# Altium PCB 球锁蓝牙20618.PcbDoc (part 2 of 2)
Units mil, origin at the board's own origin, x right, y up, seen from the top; angles counter-clockwise.
Board outline 1946 x 1905.51 mil, 2 copper layers (Top Layer, Bottom Layer); 90 components, 56 nets, 267 pads, 202 vias.
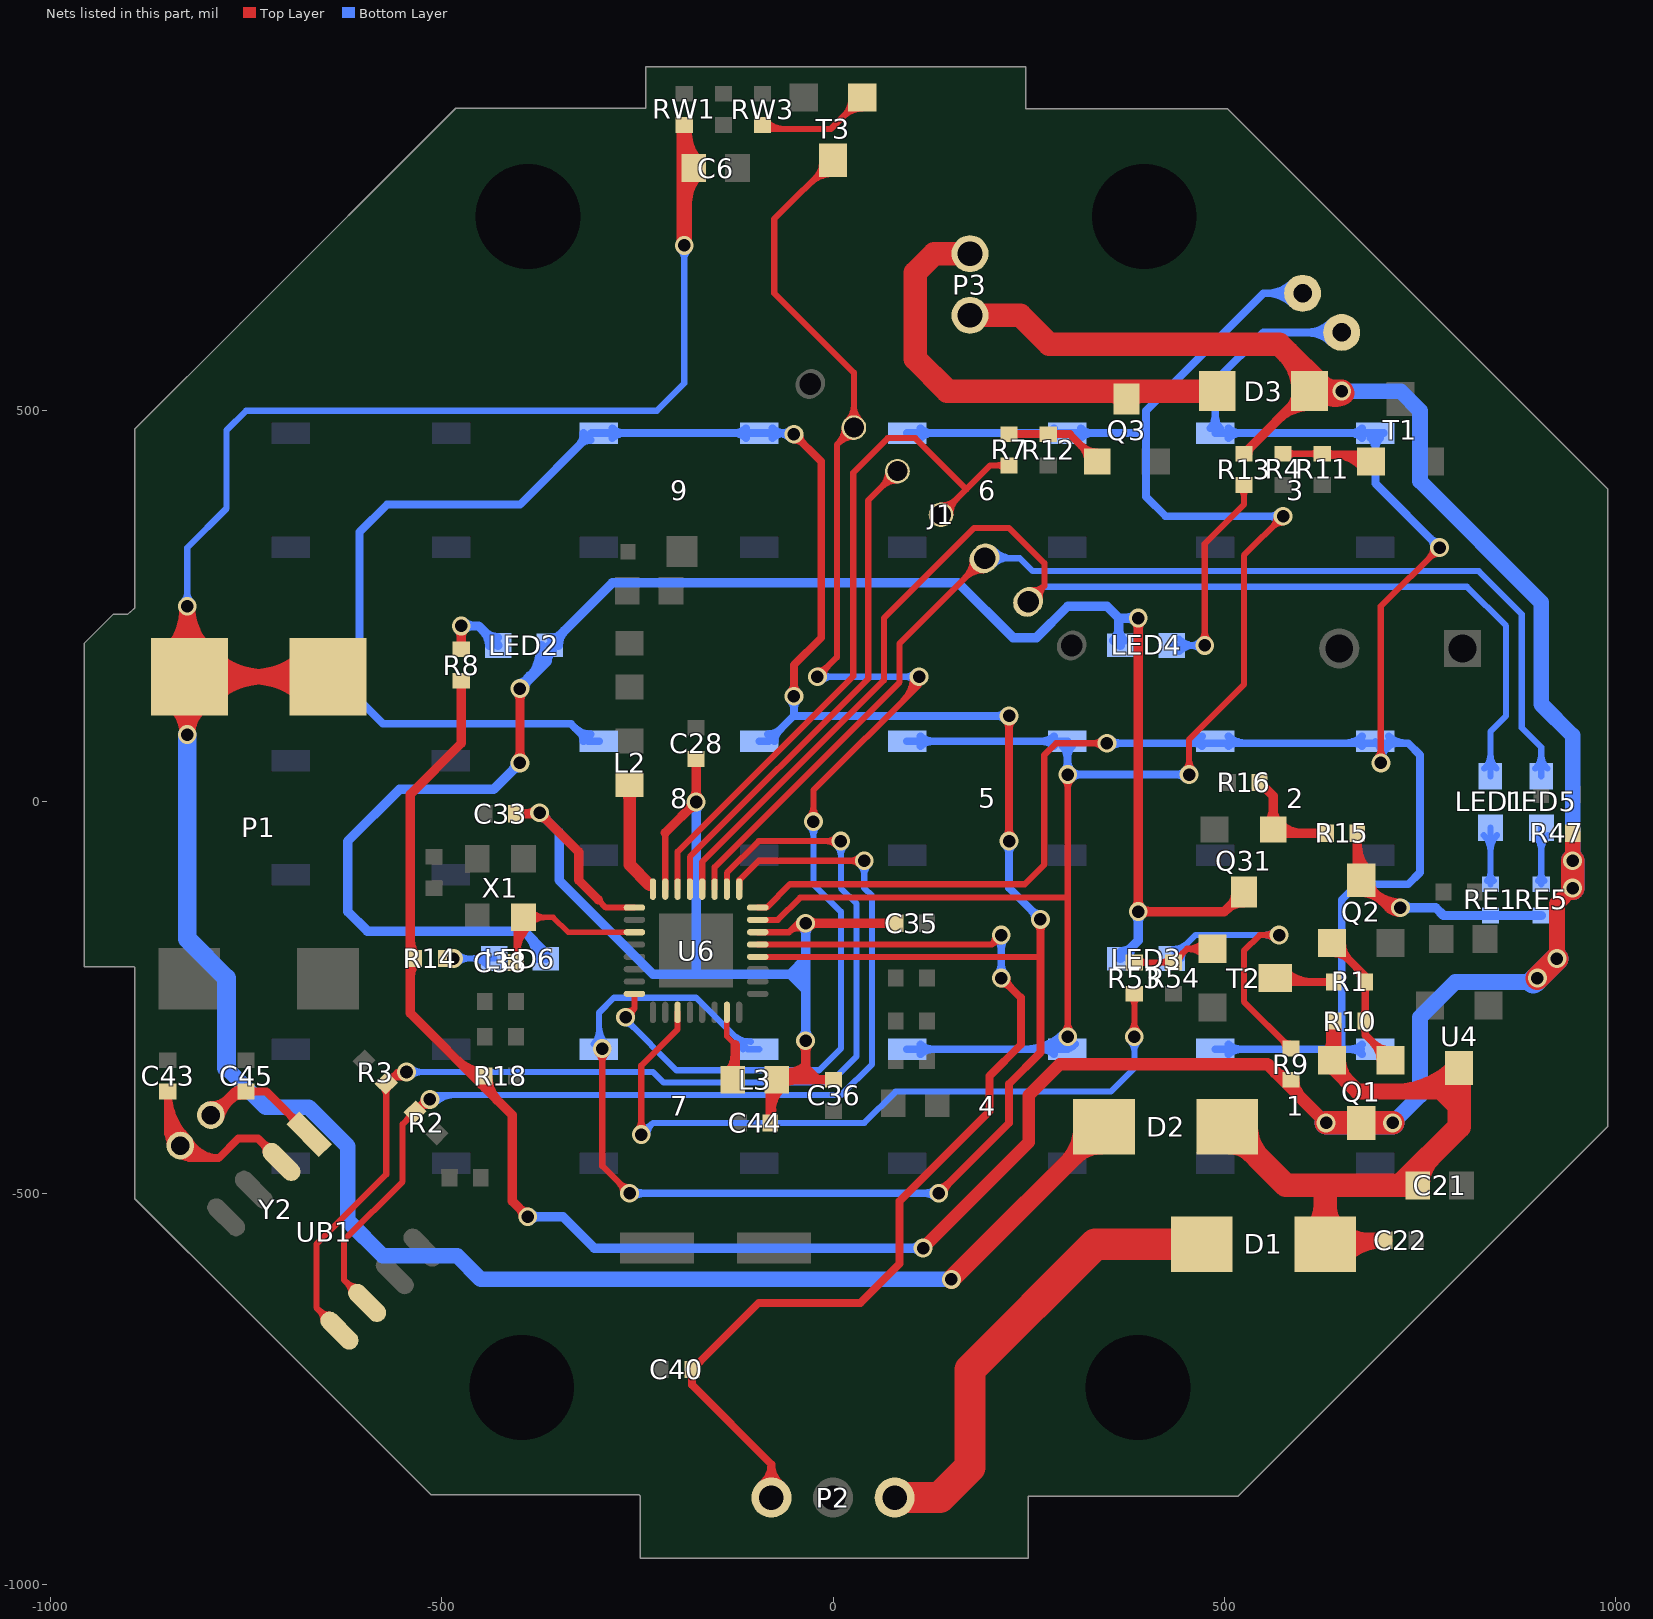
[diagram p2: the nets of this part, all layers, seen from the top]

## Via types
v1: diameter 24, hole 16, Top Layer to Bottom Layer, tented both sides, 202 vias

## Nets (pads, with @x,y where several pads share a name; then routed paths per layer and width w, separated by ;. In a path a pad name is that pad's centre, name@x,y a point inside that pad or via, vN(x,y) a via of type N, cw(c..) or ccw(c..) an arc to the next point about the centre after c; other vN are vias at no path point) (continued)
NetC38_2: C38.2 U6.3 X1.3 | length 479.8
  Top Layer w7: C38.2@-409.6,-199.4 ccw(c-420.69,-188.31) -405,-188.31 ccw(c-389.31,-188.31) C38.2@-400.4,-199.4 ; C38.2@-408.4,-198.46 ccw(c-415.74,-186.48) -402.08,-189.76 ; C38.2@-407,-205 C38.2@-405,-203 ; C38.2@-405,-205 C38.2@-405,-203 ; C38.2@-405,-201.94 cw(c-342.9,-201.94) X1.3@-386.81,-158.03 ; -405,-185.04 cw(c-359.8,-185.04) X1.3@-391.76,-153.08 ; -405,-168.14 cw(c-376.7,-168.14) X1.3@-396.71,-148.13 ; -401.54,-187.5 ccw(c-384.68,-191.54) C38.2@-399.46,-200.6 ; X1.3@-386.81,-156.06 cw(c-365.9,-176.97) -365.9,-147.4 cw(c-365.9,-117.83) X1.3@-386.81,-138.74 ; -275,-166.38 -338.62,-166.38 ; U6.3@-253.74,-166.38 -338.62,-166.38 ; C38.2@-405,-203 -405,-156.93 X1.3@-395.47,-147.4 -357.6,-147.4 -338.62,-166.38
NetC43_1: C43.1 UB1.2 Y2.2 | length 587.1
  Top Layer w10: C43.1@-853.54,-373.54 cw(c-862.07,-382.07) -850,-382.07 cw(c-837.93,-382.07) C43.1@-846.46,-373.54 ; -850,-418 ccw(c-813.18,-418) Y2.2@-839.1,-444.15 ; -850,-394 ccw(c-789.38,-394) Y2.2@-832.06,-437.05 ; Y2.2@-846.34,-435.99 ccw(c-859.78,-432.73) -850,-422.95 ; Y2.2@-840.33,-442.53 ccw(c-819.08,-430.66) -819.08,-455 ; Y2.2@-836.97,-426.62 cw(c-840.22,-413.17) -850,-422.95 ; Y2.2@-831.6,-437.65 ccw(c-802.04,-421.14) -802.04,-455 ; Y2.2@-830.99,-451.34 cw(c-827.73,-464.78) -817.95,-455 ; Y2.2@-825.02,-429.95 cw(c-765.59,-370) C43.1@-850,-370 -850,-422.95 ; Y2.2@-822.87,-432.77 ccw(c-785,-411.62) -785,-455 ; Y2.2@-821.62,-441.97 ccw(c-808.17,-445.22) -817.95,-455 ; UB1.2@-724.04,-447.41 ccw(c-740.48,-447.41) -728.86,-435.79 ccw(c-717.23,-424.16) UB1.2@-717.23,-440.6 ; UB1.2@-704.7,-459.94 -734.64,-430 -760,-430 -785,-455 ; -850,-422.95 Y2.2@-833.98,-438.98 -817.95,-455 ; -817.95,-455 -785,-455
NetC45_2: C45.2 UB1.1 Y2.1 | length 374
  Top Layer w10: Y2.1@-795,-400 -765,-370 C45.2@-750,-370 -723.93,-370 UB1.1@-669.35,-424.59 ; Y2.1@-795,-387.28 ccw(c-795,-356.58) -773.29,-378.29 ccw(c-751.58,-400) Y2.1@-782.28,-400 ; Y2.1@-791.71,-387.72 ccw(c-787.5,-372.02) -779.38,-386.09 ; Y2.1@-783.44,-388.44 cw(c-751,-420.87) C45.2@-751,-375 ; Y2.1@-782.72,-403.29 cw(c-739.1,-414.98) -761.68,-375.87 ; -766.36,-371.36 cw(c-751,-386.73) C45.2@-751,-365 ; C45.2@-754.54,-373.54 ccw(c-763.07,-382.07) -763.07,-370 ccw(c-763.07,-357.93) C45.2@-754.54,-366.46 ; C45.2@-745.46,-373.54 cw(c-736.93,-382.07) -736.93,-370 cw(c-736.93,-357.93) C45.2@-745.46,-366.46 ; UB1.1@-688.69,-412.06 ccw(c-705.13,-412.06) -693.5,-400.43 ccw(c-681.88,-388.8) UB1.1@-681.88,-405.25
NetD1_1: D1.1 P2.1 | length 677.3
  Top Layer w30: D1.1@452.87,-579.45 ccw(c417.99,-614.33) 417.99,-565 ccw(c417.99,-515.67) D1.1@452.87,-550.55
  Top Layer w40: P2.1@78.74,-888.78 136.22,-888.78 175,-850 175,-725 335,-565 D1.1@471.26,-565
NetD3_1: D3.1 P3.1 Q3.C | length 637.5
  Top Layer w30: P3.1@175,700.59 129.37,700.59 105,676.22 105,566.22 146.22,525 D3.1@490.94,525 ; 353.8,525 cw(c353.8,496.76) Q3.C@373.78,516.73 ; Q3.C@376.22,516.73 cw(c396.2,496.76) 396.2,525
NetL2_2: L2.2 U6.32 | length 167.9
  Top Layer w16: L2.2@-265.48,16.52 cw(c-278.71,3.29) -260,3.29 cw(c-241.29,3.29) L2.2@-254.52,16.52 ; L2.2@-260,22 -260,-80 -234.18,-105.82
NetL3_2: L3.2 U6.15 | length 128.9
  Top Layer w7: U6.15@-135.63,-268.74 -135.63,-299.37 -125,-310
  Top Layer w12: L3.2@-134.89,-346.14 ccw(c-158.78,-322.26) -125,-322.26 ; L3.2@-128,-355 -125,-352 -125,-310 ; -125,-336.74 ccw(c-111.71,-336.74) L3.2@-121.11,-346.14
NetLED1_1: LED1.1 RE1.2 | length 140.3
  Bottom Layer w8: LED1.1@831.51,-42.49 cw(c811.03,-62.97) 840,-62.97 cw(c868.97,-62.97) LED1.1@848.49,-42.49 ; RE1.2@835.76,-100.76 ccw(c825.51,-90.51) 840,-90.51 ccw(c854.49,-90.51) RE1.2@844.24,-100.76 ; RE1.2@840,-105 LED1.1@840,-33
NetLED2_1: LED2.1 R8.2 | length 170.4
  Top Layer w11.81: v1@-479.18,220.82 cw(c-489.26,210.74) -475,210.74 cw(c-460.74,210.74) v1@-470.82,220.82 ; R8.2@-475,195 v1(-475,225)
  Bottom Layer w11.81: v1(-475,225) -453,225 LED2.1@-428,200 ; v1@-470.82,220.82 cw(c-460.74,210.74) -460.74,225 cw(c-460.74,239.26) v1@-470.82,229.18 ; -446.94,218.94 cw(c-465.88,200) LED2.1@-439.09,200 ; -444.53,216.53 ccw(c-429,232.05) LED2.1@-429,210.09
NetLED2_2: LED2.2 LED3.2 LED4.2 LED6.2 Q31.C | length 2786.3
  Top Layer w12: v1@-404.11,54.11 ccw(c-414.03,64.03) -400,64.03 ccw(c-385.97,64.03) v1@-395.89,54.11 ; v1@-404.11,140.89 cw(c-414.03,130.97) -400,130.97 cw(c-385.97,130.97) v1@-395.89,140.89 ; v1(-400,50) v1(-400,145) ; v1@385.89,-135.89 ccw(c375.97,-125.97) 390,-125.97 ccw(c404.03,-125.97) 394.11,-135.89 ccw(c404.03,-125.97) 404.03,-140 ccw(c404.03,-154.03) v1@394.11,-144.11 ; v1@385.89,230.89 cw(c375.97,220.97) 390,220.97 cw(c404.03,220.97) v1@394.11,230.89 ; v1(390,235) v1(390,-140) 500,-140 Q31.C@525,-115 ; 501.64,-138.36 cw(c525,-161.72) Q31.C@525,-128.68 ; Q31.C@508.77,-131.23 ccw(c495.49,-117.95) Q31.C@514.27,-117.95
  Bottom Layer w12: v1@-405.81,50 cw(c-419.84,50) -409.92,40.08 cw(c-400,30.16) v1@-400,44.19 ; v1@-401.5,150.61 ccw(c-407.46,172.86) -387.52,161.34 ; v1(-400,50) -433.87,16.13 -553.87,16.13 -620,-50 -620,-140 -595,-165 -395,-165 -367,-193 LED6.2@-367,-200 ; v1(-400,145) -365,180 ; v1@-400,150.81 ccw(c-400,164.84) -390.08,154.92 ccw(c-380.16,145) v1@-394.19,145 ; v1@-392.8,152.2 ccw(c-440.6,200) LED2.2@-373,200 ; -390.73,-169.27 cw(c-421.46,-200) LED6.2@-378,-200 ; -372.31,172.69 ccw(c-399.63,200) LED2.2@-361,200 ; LED2.2@-370.36,193.64 cw(c-383.31,180.69) -365,180.69 ; LED2.2@-360,209 ccw(c-360,225.9) LED2.2@-348.05,213.95 ; LED2.2@-358.59,192.81 ccw(c-348.95,179.98) -365,179.98 ; LED2.2@-351,200 cw(c-324.44,200) -343.22,218.78 ; LED4.2@358.64,206.36 ccw(c343.27,221.73) 365,221.73 ccw(c386.73,221.73) LED4.2@371.36,206.36 ; LED3.2@367,-193 LED3.2@367,-200 390,-177 v1(390,-140) ; LED4.2@367,200 365,202 365,235 ; LED3.2@369,-191 ccw(c369,-174.1) LED3.2@380.95,-186.05 ; LED3.2@378,-200 cw(c404.56,-200) 385.78,-181.22 ; v1@385.89,-144.11 cw(c375.97,-154.03) 390,-154.03 cw(c404.03,-154.03) v1@394.11,-144.11 ; v1@385.89,230.89 ccw(c375.97,220.97) 375.97,235 ccw(c375.97,249.03) v1@385.89,239.11 ; v1(390,235) 365,235 ; -365,180 LED2.2@-365,190 ; LED2.2@-365,190 -362,193 LED2.2@-362,200 ; LED2.2@-365,190 -365,197 LED2.2@-362,200 ; LED2.2@-362,200 -282,280 160,280 230,210 260,210 300,250 350,250 365,235
NetLED3_1: LED3.1 R9.2 | length 480.1
  Top Layer w8: v1@564.48,-175.52 ccw(c551.14,-188.86) 551.14,-170 ccw(c551.14,-151.14) v1@564.48,-164.48 ; v1(570,-170) 545,-170 525,-190 525,-255 R9.2@585,-315 ; 573.05,-303.05 cw(c561.1,-315) R9.2@578,-315 ; R9.2@575.46,-305.46 ccw(c584,-296.93) R9.2@584,-309
  Bottom Layer w8: LED3.1@433,-200 463,-170 v1(570,-170) ; LED3.1@434,-188 ccw(c434,-161.44) 452.78,-180.22 ; LED3.1@446,-200 cw(c477.38,-200) 455.19,-177.81 ; v1@564.48,-175.52 ccw(c551.14,-188.86) 551.14,-170 ccw(c551.14,-151.14) v1@564.48,-164.48
NetLED4_1: LED4.1 R13.2 | length 395.2
  Top Layer w8: v1@469.48,205.52 ccw(c456.14,218.86) 475,218.86 ccw(c493.86,218.86) v1@480.52,205.52 ; v1(475,200) 475,330 525,380 R13.2@525,405 ; R13.2@520.76,400.76 cw(c510.51,390.51) 525,390.51 cw(c539.49,390.51) R13.2@529.24,400.76
  Bottom Layer w8: LED4.1@433,200 v1(475,200) ; LED4.1@442.49,191.51 cw(c462.97,171.03) 462.97,200 cw(c462.97,228.97) LED4.1@442.49,208.49 ; v1@469.48,194.48 ccw(c456.14,181.14) 456.14,200 ccw(c456.14,218.86) v1@469.48,205.52
NetLED5_1: LED5.1 RE5.2 | length 140.7
  Bottom Layer w7.87: LED5.1@896.47,-42.53 cw(c875.88,-63.12) 905,-63.12 cw(c934.12,-63.12) LED5.1@913.53,-42.53 ; RE5.2@900.71,-100.71 ccw(c890.36,-90.36) 905,-90.36 ccw(c919.64,-90.36) RE5.2@909.29,-100.71 ; RE5.2@905,-105 LED5.1@905,-33
NetLED6_1: LED6.1 R14.2 | length 137.1
  Top Layer w12: R14.2@-495,-200 v1(-485,-200)
  Bottom Layer w8: v1(-485,-200) LED6.1@-433,-200 ; v1@-479.48,-205.52 cw(c-466.14,-218.86) -466.14,-200 cw(c-466.14,-181.14) v1@-479.48,-194.48 ; LED6.1@-442.49,-208.49 ccw(c-462.97,-228.97) -462.97,-200 ccw(c-462.97,-171.03) LED6.1@-442.49,-191.51
NetQ1_G: Q1.G Q2.G R1.1 R10.2 | length 371.1
  Top Layer w10: Q2.G@637.6,-193 cw(c637.6,-224.38) 659.79,-202.19 cw(c681.98,-180) Q2.G@650.6,-180 ; Q2.G@637.6,-180 680,-222.4 R1.1@680,-230 R10.2@680,-280 680,-297.6 Q1.G@712.4,-330 Q1.G@712.4,-317.4 ; 666.8,-209.2 cw(c647,-229) R1.1@675,-229 ; R10.2@676.46,-284.54 cw(c667.93,-293.07) 680,-293.07 cw(c692.07,-293.07) R10.2@683.54,-284.54 ; R10.2@676.46,-275.46 ccw(c667.93,-266.93) 680,-266.93 ccw(c692.07,-266.93) R10.2@683.54,-275.46 ; R1.1@676.46,-234.54 cw(c667.93,-243.07) 680,-243.07 cw(c692.07,-243.07) R1.1@683.54,-234.54 ; Q1.G@699.4,-330 ccw(c668.02,-330) 690.21,-307.81 ccw(c712.4,-285.62) Q1.G@712.4,-317
NetQ3_B: Q3.B R7.1 R12.1 | length 272.4
  Top Layer w10: R7.1@225,470 R12.1@275,470 ; R7.1@229.54,466.46 cw(c238.07,457.93) 238.07,470 cw(c238.07,482.07) R7.1@229.54,473.54 ; R12.1@270.46,466.46 ccw(c261.93,457.93) 261.93,470 ccw(c261.93,482.07) R12.1@270.46,473.54 ; 300,470 R12.1@275,470 ; Q3.B@325.87,435 ccw(c297.54,435) 317.57,455.03 ccw(c337.6,475.06) Q3.B@337.6,446.73 ; Q3.B@337.6,435 302.6,470 R12.1@275,470 ; 288.07,470 cw(c288.07,482.07) 279.54,473.54 ccw(c288.07,482.07) 288.07,470 ; 288.07,470 ccw(c288.07,457.93) 279.54,466.46 cw(c288.07,457.93) 288.07,470
NetQ31_B: Q31.B R15.1 R16.2 | length 221.5
  Top Layer w11.81: R16.2@545,19.91 cw(c545,7.61) R16.2@553.7,16.3 ; R16.2@545,25 562.4,7.6 Q31.B@562.4,-35 567.4,-40 R15.1@630,-40 ; Q31.B@554.75,-27.34 ccw(c536.26,-8.86) 562.4,-8.86 ccw(c588.54,-8.86) 570.06,-27.34 ccw(c600.61,3.21) 600.61,-40
NetR1_2: R1.2 T2.3 | length 174.4
  Top Layer w10: T2.3@570.77,-222.88 ccw(c587.97,-205.69) 587.97,-230 ccw(c587.97,-244.31) T2.3@577.85,-234.19 ; T2.3@575,-225 T2.3@565,-225 570,-230 R1.2@640,-230 ; T2.3@577.85,-215.81 ccw(c612.11,-181.54) 612.11,-230 ; R1.2@636.46,-233.54 ccw(c627.93,-242.07) 627.93,-230 ccw(c627.93,-217.93) R1.2@636.46,-226.46
NetR4_1: R4.1 R11.1 T1.1 | length 324.4
  Top Layer w7.87: R4.1@575,445 R11.1@625,445 677.6,445 T1.1@687.6,435 ; R4.1@580.29,440.71 cw(c590.64,430.36) 590.64,445 cw(c590.64,459.64) R4.1@580.29,449.29 ; R11.1@619.71,440.71 ccw(c609.36,430.36) 609.36,445 ccw(c609.36,459.64) R11.1@619.71,449.29 ; R11.1@629.23,439.87 cw(c638.45,425.25) 642.27,442.1 ; R11.1@629.5,445 cw(c629.5,376.91) T1.1@677.65,425.06 ; R11.1@630.29,440.71 cw(c640.64,430.36) 640.64,445 cw(c640.64,459.64) R11.1@630.29,449.29 ; R11.1@631.13,448.23 ccw(c641.27,454.63) 638.62,442.93 ; 648.51,445 cw(c648.51,395.92) T1.1@683.22,430.62 ; 667.52,445 cw(c667.52,414.93) T1.1@688.79,436.19
NetR53_2: R53.2 R54.2 T2.1 | length 225.7
  Top Layer w8: R53.2@385,-205 R54.2@435,-205 452.4,-187.6 ; R53.2@390.24,-209.24 cw(c400.49,-219.49) 400.49,-205 cw(c400.49,-190.51) R53.2@390.24,-200.76 ; R54.2@429.76,-209.24 ccw(c419.51,-219.49) 419.51,-205 ccw(c419.51,-190.51) R54.2@429.76,-200.76 ; R54.2@436,-199 ccw(c436,-186.93) R54.2@444.54,-195.46 ; R54.2@442,-205 cw(c458.9,-205) 446.95,-193.05 ; T2.1@474.85,-197.24 ccw(c452.4,-218.54) 452.4,-187.6 ; T2.1@474.85,-177.96 cw(c452.4,-156.65) 452.4,-187.6 ; T2.1@485,-187.6 452.4,-187.6
NetRW3_1: RW3.1 T3.1 | length 224.7
  Top Layer w8: RW3.1@-90,867 -83,860 -2.6,860 T3.1@37.4,900 ; RW3.1@-84.76,869.24 ccw(c-62.44,891.56) -62.44,860 ; T3.1@23.4,900 cw(c-10.4,900) 13.5,876.1 cw(c37.4,852.2) T3.1@37.4,886
P04/LED_RED: J1.3 LED5.2 U6.27 | length 1644.8
  Top Layer w7.87: U6.27@-151.38,-111.26 -151.38,-83.19 85,153.19 85,202.71 J1.3@193.64,311.36 ; J1.3@178.47,309.96 cw(c145.21,309.96) 168.73,286.44 cw(c192.25,262.92) J1.3@192.25,296.18
  Bottom Layer w8: J1.3@193.64,311.36 238.64,311.36 255,295 825,295 880,240 880,95 905,70 LED5.2@905,33 ; J1.3@204.74,303.05 cw(c224.79,282.99) 224.79,311.36 ; J1.3@204.74,322.45 ccw(c231.51,349.22) 231.51,311.36 ; LED5.2@897.22,42.78 ccw(c878.44,61.56) 905,61.56 ccw(c931.56,61.56) LED5.2@912.78,42.78
P05/LED_GREEN: J1.2 LED1.2 U6.28 | length 1690.6
  Top Layer w7.87: U6.28@-167.13,-111.26 -167.13,-76.67 65,155.46 65,235 180,350 225,350 270,305 270,276.36 ; J1.2@249.32,255.68 270,276.36 ; J1.2@252.78,270.69 ccw(c255.79,290.57) 270,276.35 ; J1.2@264.34,259.13 cw(c284.21,262.14) 270,276.35
  Bottom Layer w8: J1.2@249.32,255.68 268.64,275 810,275 860,225 860,110 840,90 LED1.2@840,33 ; LED1.2@832.22,42.78 ccw(c813.44,61.56) 840,61.56 ccw(c866.56,61.56) LED1.2@847.78,42.78
P06/MOTO1: J1.5 U6.29 | length 688.6
  Top Layer w7.87: U6.29@-182.87,-111.26 -182.87,-70.14 45,157.73 45,385.42 J1.5@82.29,422.71 ; J1.5@70.48,422.71 cw(c41.96,422.71) 62.13,402.55 cw(c82.29,382.39) J1.5@82.29,410.9
P07/MOTO0: J1.4 R7.2 U6.30 | length 996
  Top Layer w7.87: U6.30@-198.62,-111.26 -198.62,-63.62 25.75,160.75 25.75,420.75 70,465 105,465 170.47,399.53 ; J1.4@137.97,367.03 170.47,399.53 ; J1.4@137.97,378.84 ccw(c137.97,407.36) 158.13,387.2 ccw(c178.29,367.03) J1.4@149.78,367.03 ; R7.2@219.71,425.71 ccw(c209.36,415.36) 209.36,430 ccw(c209.36,444.64) R7.2@219.71,434.29 ; R7.2@225,430 200.93,430 170.47,399.53
PWR_CTL: R53.1 U6.11 | length 1078.1
  Top Layer w7.87: v1@-250.57,-419.43 ccw(c-264.01,-405.99) -245,-405.99 ccw(c-225.99,-405.99) v1@-239.43,-419.43 ; v1(-245,-425) -245,-336.77 -198.62,-290.39 U6.11@-198.62,-268.74 ; v1@379.43,-294.43 ccw(c365.99,-280.99) 385,-280.99 ccw(c404.01,-280.99) v1@390.57,-294.43 ; R53.1@380.71,-249.29 cw(c370.36,-259.64) 385,-259.64 cw(c399.64,-259.64) R53.1@389.29,-249.29 ; v1(385,-300) R53.1@385,-245
  Bottom Layer w7.87: v1(-245,-425) -230,-410 40,-410 80,-370 355,-370 385,-340 v1(385,-300) ; v1@-245,-417.13 ccw(c-245,-398.12) -231.56,-411.56 ccw(c-218.12,-425) v1@-237.13,-425 ; v1@379.43,-305.57 cw(c365.99,-319.01) 385,-319.01 cw(c404.01,-319.01) v1@390.57,-305.57
RD1_KEYX_2: 4.2 5.2 6.2 pad.1@600,650 U6.23 | length 3323.7
  Top Layer w7.87: U6.23@-96.26,-150.63 -70.63,-150.63 -42.19,-122.19 297.19,-122.19 300,-125 ; v1@294.43,-294.43 ccw(c280.99,-280.99) 300,-280.99 ccw(c319.01,-280.99) v1@305.57,-294.43 ; v1@294.43,29.43 cw(c280.99,15.99) 300,15.99 cw(c319.01,15.99) v1@305.57,29.43 ; v1(300,-300) 300,-125 ; v1(300,35) 300,-125 ; v1@449.43,40.57 ccw(c435.99,54.01) 455,54.01 ccw(c474.01,54.01) v1@460.57,40.57 ; v1(455,35) 455,80 525,150 525,315 v1(575,365) ; v1@567.13,365 cw(c548.12,365) 561.56,351.56 cw(c575,338.12) v1@575,357.13
  Bottom Layer w7.87: 4.2@294.81,-305.92 cw(c285.98,-316.01) 4.2@299.39,-316 ; 4.2@295.26,-307.07 ccw(c292.27,-300.61) v1@299.39,-300.61 ; v1(300,-300) v1@299.39,-300.61 ; 4.2@303.52,-307.07 cw(c306.51,-300.61) v1@299.39,-300.61 ; 4.2@304.42,-306.51 ccw(c310.87,-316.01) 4.2@299.39,-316 ; 4.2@299.39,-316 v1@299.39,-300.61
  Bottom Layer w10: 4.2@94.67,-316 4.2@299.39,-316 ; 5.2@94.67,77.7 5.2@299.39,77.7 299.39,35.61 v1(300,35) v1(455,35) ; 6.2@94.67,471.4 6.2@303.6,471.4 ; 4.2@111.7,-322.21 cw(c126.69,-337.2) 126.69,-316 cw(c126.69,-294.81) 4.2@111.7,-309.8 ; 5.2@111.7,71.49 cw(c126.69,56.5) 126.69,77.7 cw(c126.69,98.89) 5.2@111.7,83.9 ; 6.2@111.7,465.19 cw(c126.69,450.2) 126.69,471.4 cw(c126.69,492.59) 6.2@111.7,477.61 ; 244.92,-316 ccw(c244.92,-244.92) v1@295.18,-295.18 ; 269.06,-316 ccw(c269.06,-269.06) 4.2@302.25,-302.25 ; 4.2@282.35,-322.21 ccw(c267.37,-337.2) 267.37,-316 ccw(c267.37,-294.81) 4.2@282.35,-309.8 ; 5.2@282.35,71.49 ccw(c267.37,56.5) 267.37,77.7 ccw(c267.37,98.89) 5.2@282.35,83.91 ; 6.2@282.35,465.19 ccw(c267.37,450.2) 267.37,471.4 ccw(c267.37,492.59) 6.2@282.35,477.61 ; 4.2@293.2,-316 ccw(c293.2,-293.2) 4.2@309.33,-309.33 ; 5.2@293.18,71.49 cw(c278.19,56.5) 299.39,56.5 cw(c320.59,56.5) 5.2@305.6,71.49 ; v1@295.18,39.82 ccw(c285.03,49.97) 299.39,49.97 ; 299.39,52.92 ccw(c317.92,52.92) 304.82,39.82 ccw(c316.44,51.44) 316.44,35 ccw(c316.44,18.56) v1@304.82,30.18 ; 6.2@299.39,471.4 400,471.4 ; 6.2@316.42,465.19 cw(c331.41,450.2) 331.41,471.4 cw(c331.41,492.59) 6.2@316.42,477.61 ; v1@450.18,30.18 ccw(c438.56,18.56) 438.56,35 ccw(c438.56,51.44) v1@450.18,39.82 ; v1@570.18,360.18 ccw(c558.56,348.56) 558.56,365 ccw(c558.56,381.44) v1@570.18,369.82 ; v1(575,365) 425,365 400,390 400,471.4 ; pad.1@586.83,636.83 ccw(c555.04,605.04) 555.04,650 ccw(c555.04,694.96) pad.1@586.83,663.17 ; pad.1@600,650 550,650 400,500 400,471.4
RSTN: J1.6 T3.3 U6.8 | length 2191.7
  Top Layer w7.87: v1(-265,-275) -253.74,-263.74 ; v1@-263.96,-267.2 ccw(c-262.34,-255.14) -253.74,-263.74 ; v1@-257.2,-273.96 cw(c-245.14,-272.34) -253.74,-263.74 ; U6.8@-253.74,-245.12 -253.74,-263.74 ; v1@-30.57,-19.43 ccw(c-44.01,-5.99) -25,-5.99 ccw(c-5.99,-5.99) v1@-19.43,-19.43 ; -30.24,789.76 cw(c0,759.51) T3.3@0,802.28 ; v1(-25,-25) -25,15 110,150 v1(110,160) cw(c85.86,160) 102.93,142.93 ; -21.42,798.58 ccw(c-39.19,816.35) T3.3@-14.06,816.35 ; v1(-20,160) 5,185 5,456.78 J1.6@26.61,478.39 26.61,548.39 -75,650 -75,745 T3.3@0,820 ; v1@-20,167.87 ccw(c-20,186.88) -6.56,173.44 ccw(c6.88,160) v1@-12.13,160 ; T3.3@-16.8,803.2 cw(c0,786.4) T3.3@0,810.16 ; J1.6@14.8,478.39 cw(c-13.71,478.39) 6.45,458.23 cw(c26.61,438.06) J1.6@26.61,466.58 ; J1.6@18.26,486.74 ccw(c-1.9,506.9) 26.61,506.9 ccw(c55.13,506.9) J1.6@34.96,486.74 ; 89.49,129.49 ccw(c58.97,160) v1@102.13,160
  Bottom Layer w7.87: v1@-268.44,-282.31 cw(c-268.44,-301.32) -255,-287.87 cw(c-241.56,-274.43) v1@-260.57,-274.43 ; v1@-265,-277.87 -200.12,-342.76 -17.76,-342.76 10,-315 10,-140 -25,-105 v1(-25,-25) ; v1@-30.57,-30.57 cw(c-44.01,-44.01) -25,-44.01 cw(c-5.99,-44.01) v1@-19.43,-30.57 ; v1(-20,160) v1(110,160) ; v1@-14.43,154.43 cw(c-0.99,140.99) -0.99,160 cw(c-0.99,179.01) v1@-14.43,165.57 ; v1@104.43,154.43 ccw(c90.99,140.99) 90.99,160 ccw(c90.99,179.01) v1@104.43,165.57
RX2/SETKEY: C40.1 P2.3 U6.21 | length 1538.7
  Top Layer w7.87: U6.21@-96.26,-182.13 70,-182.13 70.06,-182.06 202.94,-182.06 ; v1@207.15,-170.63 cw(c192.65,-171.78) 202.94,-182.06 ; v1@214.37,-177.85 ccw(c213.22,-192.35) 202.94,-182.06 ; v1(215,-170) 202.94,-182.06
  Top Layer w10: C40.1@-183.54,-729.54 cw(c-192.07,-738.07) -180,-738.07 cw(c-167.93,-738.07) C40.1@-176.46,-729.54 ; C40.1@-180,-719 ccw(c-180,-704.51) -169.76,-714.76 ; C40.1@-175,-724 cw(c-165.34,-724) C40.1@-172.17,-717.17 ; P2.3@-91.51,-872.63 ccw(c-112.34,-846.26) -78.74,-846.26 ; P2.3@-78.74,-888.78 -78.74,-846.26 ; P2.3@-65.97,-872.63 cw(c-45.14,-846.26) -78.74,-846.26 ; v1@215,-231.81 cw(c215,-248.25) 226.63,-236.63 cw(c238.25,-225) v1@221.81,-225 ; v1(215,-225) 240,-250 240,-310 200,-350 200,-395 85,-510 85,-590 35,-640 -95,-640 C40.1@-180,-725 -180,-745 -78.74,-846.26
  Bottom Layer w10: v1@210.18,-220.18 ccw(c198.56,-208.56) 215,-208.56 ccw(c231.44,-208.56) v1@219.82,-220.18 ; v1@210.18,-174.82 cw(c198.56,-186.44) 215,-186.44 cw(c231.44,-186.44) v1@219.82,-174.82 ; v1(215,-225) v1(215,-170)
SCL: R2.2 U6.25 UB1.6 | length 1599.3
  Top Layer w7.87: UB1.6@-615.7,-627.53 ccw(c-634.71,-627.53) -621.27,-614.09 ccw(c-607.82,-600.65) UB1.6@-607.82,-619.66 ; UB1.6@-595.3,-640.06 -625,-610.36 -625,-560 -550,-485 -550,-411.72 R2.2@-534.14,-395.86 -518.28,-380 v1@-515.46,-380 ; R2.2@-540.91,-396.57 cw(c-555.55,-396.57) -545.2,-406.92 cw(c-534.85,-417.27) R2.2@-534.85,-402.63 ; R2.2@-534.05,-395.76 cw(c-515,-414.81) v1@-515,-387.87 ; R2.2@-533.44,-389.09 ccw(c-533.44,-374.45) -523.08,-384.8 ccw(c-512.73,-395.15) R2.2@-527.37,-395.15 ; R2.2@-528.2,-393.66 cw(c-517.83,-399.65) v1@-516.12,-387.79 ; -526.12,-387.84 ccw(c-533.95,-380) v1@-522.87,-380 ; v1@-522.76,-378.66 cw(c-536.85,-376.24) -529.7,-388.62 cw(c-522.34,-401.38) v1@-517.56,-387.45 ; U6.25@-119.88,-111.26 -119.88,-99.88 -95,-75 v1(40,-75) ; v1@34.43,-80.57 ccw(c20.99,-94.01) 20.99,-75 ccw(c20.99,-55.99) v1@34.43,-69.43
  Bottom Layer w7.87: v1@-509.43,-385.57 cw(c-482.11,-412.89) -482.11,-374.25 ; -501.12,-374.25 ccw(c-501.12,-393.88) v1(-515,-380) -509.25,-374.25 10.75,-374.25 50,-335 50,-120 40,-110 v1(40,-75) ; v1@34.43,-80.57 cw(c20.99,-94.01) 40,-94.01 cw(c59.01,-94.01) v1@45.57,-80.57
SDA: R3.2 U6.26 UB1.5 | length 1667.9
  Top Layer w7.87: UB1.5@-651.05,-662.89 ccw(c-670.06,-662.89) -656.62,-649.44 ccw(c-643.18,-636) UB1.5@-643.18,-655.01 ; UB1.5@-630.65,-675.41 -660,-646.07 -660,-565 -570.86,-475.86 R3.2@-570.86,-360.86 ; R3.2@-575.85,-364.14 cw(c-587.91,-376.19) -570.86,-376.19 ; R3.2@-570.86,-372.78 cw(c-558.63,-372.78) R3.2@-567.28,-364.14 ; R3.2@-570.15,-352.37 ccw(c-570.15,-337.73) -559.8,-348.08 ccw(c-549.45,-358.43) R3.2@-564.09,-358.43 ; R3.2@-570,-360 R3.2@-570.86,-360.86 ; -561.11,-349.4 cw(c-549.21,-361.3) v1(-545,-345) -556.72,-345 R3.2@-570.86,-359.14 ; v1@-546.97,-352.62 ccw(c-553.21,-376.79) R3.2@-570.86,-359.14 ; U6.26@-135.63,-111.26 -135.63,-90.63 -95,-50 v1(10,-50) ; v1@4.43,-55.57 ccw(c-9.01,-69.01) -9.01,-50 ccw(c-9.01,-30.99) v1@4.43,-44.43 ; R3.2@-570.86,-360.86 R3.2@-570.86,-359.14
  Bottom Layer w7.87: v1(-545,-345) -230,-345 -216.5,-358.5 -3.5,-358.5 30,-325 30,-130 10,-110 v1(10,-50) ; v1@-539.43,-350.57 cw(c-525.99,-364.01) -525.99,-345 cw(c-525.99,-325.99) v1@-539.43,-339.43 ; v1@4.43,-55.57 cw(c-9.01,-69.01) 10,-69.01 cw(c29.01,-69.01) v1@15.57,-55.57
TD1_KEYX_1: 1.2 2.2 3.2 pad.0 U6.24 | length 3270.2
  Top Layer w7.87: U6.24@-96.26,-134.88 -84.88,-134.88 -55,-105 245,-105 270,-80
  Top Layer w8: 270,-80 270,60 285,75 v1(350,75) ; v1@344.48,69.48 ccw(c331.14,56.14) 331.14,75 ccw(c331.14,93.86) v1@344.48,80.52 ; v1@694.48,55.52 ccw(c681.14,68.86) 700,68.86 ccw(c718.86,68.86) v1@705.52,55.52 ; v1(700,50) 700,250 v1(775,325) ; v1@767.19,325 cw(c748.33,325) 761.67,311.67 cw(c775,298.33) v1@775,317.19
  Bottom Layer w8: 2.2@693.09,77.7 695.79,75 700,70.79 v1(700,50) ; v1@694.48,55.52 ccw(c681.14,68.86) 700,68.86 ccw(c718.86,68.86) v1@705.52,55.52 ; 2.2@697,70.78 cw(c689.76,63.54) 700,63.54 ; v1@698.24,57.61 ccw(c696.65,64.49) 703.47,62.66 ccw(c710.41,60.8) v1@705.42,55.62 ; v1@700,49.73 cw(c725.63,49.73) 2.2@709.91,69.97
  Bottom Layer w10: v1(350,75) 695.79,75 735,75 750,60 750,-90 735,-105 670,-105 650,-125 650,-316 ; v1@354.82,70.18 cw(c366.44,58.56) 366.44,75 cw(c366.44,91.44) v1@354.82,79.82 ; 449.83,75 ccw(c449.83,105.4) 2.2@471.33,83.9 ; 462.85,75 cw(c462.85,63.01) 2.2@471.33,71.49 ; 3.2@482.16,477.61 ccw(c467.17,492.59) 488.37,492.59 ccw(c509.56,492.59) 3.2@494.57,477.61 ; 1.2@488.37,-316 650,-316 ; 1.2@505.4,-322.21 cw(c520.39,-337.2) 520.39,-316 cw(c520.39,-294.81) 1.2@505.4,-309.8 ; 2.2@505.4,71.49 cw(c513.88,63.01) 513.88,75 ; 2.2@505.4,83.9 ccw(c526.9,105.4) 526.9,75 ; 3.2@505.4,465.19 cw(c520.39,450.2) 520.39,471.4 cw(c520.39,492.59) 3.2@505.4,477.61 ; pad.0@636.83,586.83 ccw(c605.04,555.04) 605.04,600 ccw(c605.04,644.96) pad.0@636.83,613.17 ; pad.0@650,600 550,600 488.37,538.37 3.2@488.37,471.4 3.2@693.09,471.4 ; 654.56,75 ccw(c654.56,105.4) 2.2@676.06,83.91 ; 667.58,75 cw(c667.58,63.01) 2.2@676.06,71.49 ; 1.2@675,-316 650,-316 ; 1.2@676.06,-322.21 ccw(c661.07,-337.2) 661.07,-316 ccw(c661.07,-294.81) 1.2@676.06,-309.8 ; 3.2@676.06,465.19 ccw(c661.07,450.2) 661.07,471.4 ccw(c661.07,492.59) 3.2@676.06,477.61 ; 3.2@686.88,465.19 cw(c671.89,450.2) 693.09,450.2 cw(c714.29,450.2) 3.2@699.3,465.19 ; 3.2@703.6,471.4 3.2@693.09,471.4 ; 2.2@710.13,71.49 cw(c718.6,63.01) 718.6,75 ; 2.2@710.13,83.91 ccw(c731.62,105.4) 731.62,75 ; v1@768.19,325 ccw(c751.75,325) 763.37,336.63 ccw(c775,348.25) v1@775,331.81 ; v1(775,325) 693.09,406.91 3.2@693.09,471.4
TX2_KEYX_3: 7.2 8.2 9.2 U6.20 | length 4481
  Top Layer w7.87: U6.20@-96.26,-197.87 265,-197.87
  Top Layer w8: v1@-300.66,-320.66 cw(c-314.31,-334.31) -295,-334.31 cw(c-275.69,-334.31) v1@-289.34,-320.66 ; v1(-295,-315) -295,-465 v1(-260,-500) ; v1@-267.81,-500 ccw(c-286.67,-500) -273.33,-486.67 ccw(c-260,-473.33) v1@-260,-492.19
  Top Layer w10: v1@-54.82,139.82 ccw(c-66.44,151.44) -50,151.44 ccw(c-33.56,151.44) v1@-45.18,139.82 ; v1(-50,135) -50,175 -15,210 -15,435 v1(-50,470) ; v1@-50,463.19 cw(c-50,446.75) -38.37,458.37 cw(c-26.75,470) v1@-43.19,470 ; v1(135,-500) 225,-410 225,-360 265,-320 265,-197.87 v1(265,-150) ; v1@135,-493.19 ccw(c135,-476.75) 146.63,-488.37 ccw(c158.25,-500) v1@141.81,-500 ; v1@220.18,-45.18 ccw(c208.56,-33.56) 225,-33.56 ccw(c241.44,-33.56) v1@229.82,-45.18 ; v1@220.18,105.18 cw(c208.56,93.56) 225,93.56 cw(c241.44,93.56) v1@229.82,105.18 ; v1(225,-50) v1(225,110) ; v1@260.18,-154.82 cw(c248.56,-166.44) 265,-166.44 cw(c281.44,-166.44) v1@269.82,-154.82
  Bottom Layer w8: 7.2@-305.95,-309.09 ccw(c-322.65,-292.39) -299.04,-292.39 ccw(c-275.43,-292.39) 7.2@-292.12,-309.09 ; 7.2@-299.04,-316 -299.04,-269.04 -280,-250 -175,-250 -109,-316 7.2@-94.31,-316 ; -299.04,-285.94 ccw(c-265.94,-285.94) 7.2@-289.34,-309.34 ; -128.42,-296.58 ccw(c-105.14,-273.3) 7.2@-105.14,-306.22 ; -119.1,-305.9 cw(c-129.21,-316) 7.2@-114.92,-316
  Bottom Layer w10: -329.69,94.69 ccw(c-309.86,114.52) 8.2@-309.86,86.48 ; -325.74,454.26 ccw(c-342.88,471.4) 9.2@-318.64,471.4 ; 8.2@-322.85,87.85 cw(c-332.99,77.7) 8.2@-318.64,77.7 ; -322.7,457.3 cw(c-309.86,444.46) 9.2@-309.86,462.62 ; 8.2@-299.04,77.7 -312.7,77.7 -335,100 -575,100 -605,130 -605,345 -570,380 -400,380 -308.6,471.4 9.2@-299.04,471.4 9.2@-94.31,471.4 -51.4,471.4 v1(-50,470) ; 9.2@-282,465.19 cw(c-267.01,450.2) -267.01,471.4 cw(c-267.01,492.59) 9.2@-282,477.61 ; v1(-260,-500) v1(135,-500) ; v1@-255.18,-504.82 cw(c-243.56,-516.44) -243.56,-500 cw(c-243.56,-483.56) v1@-255.18,-495.18 ; 9.2@-111.35,465.19 ccw(c-126.33,450.2) -126.33,471.4 ccw(c-126.33,492.59) 9.2@-111.35,477.61 ; 8.2@-94.31,77.7 -82.3,77.7 -50,110 ; 8.2@-83.48,86.48 ccw(c-83.48,110.52) -66.48,93.52 ; 9.2@-77.28,465.19 cw(c-62.29,450.2) -62.29,471.4 cw(c-62.29,492.59) 9.2@-77.28,477.61 ; 8.2@-74.7,77.7 cw(c-56.36,77.7) -69.33,90.67 ; 9.2@-69.82,471.4 cw(c-69.82,450.18) v1@-54.82,465.18 ; -63.07,471.4 ccw(c-63.07,483.07) v1@-54.82,474.82 ; v1@-54.82,130.18 cw(c-66.44,118.56) -50,118.56 cw(c-33.56,118.56) v1@-45.18,130.18 ; v1@-50,125 -50,110 ; v1@130.18,-504.82 ccw(c118.56,-516.44) 118.56,-500 ccw(c118.56,-483.56) v1@130.18,-495.18 ; v1@220.18,-54.82 cw(c208.56,-66.44) 225,-66.44 cw(c241.44,-66.44) v1@229.82,-54.82 ; v1@220.18,105.18 ccw(c208.56,93.56) 208.56,110 ccw(c208.56,126.44) v1@220.18,114.82 ; v1(225,-50) 225,-110 v1(265,-150) ; v1(225,110) -50,110 ; v1@258.19,-150 ccw(c241.75,-150) 253.37,-138.37 ccw(c265,-126.75) v1@265,-143.19
V6V: D3.2 P3.2 Q1.D R8.1 R9.1 R13.1 R14.1 R18.1 R47.2 | length 4692.2
  Top Layer w12: -540,-222.73 cw(c-513.27,-222.73) R14.1@-532.17,-203.83 ; -540,-177.27 ccw(c-513.27,-177.27) R14.1@-532.17,-196.17 ; R14.1@-535,-200 R14.1@-540,-200 ; -479.14,-330.86 ccw(c-445,-296.72) R18.1@-445,-345 ; R8.1@-475,155 -475,75 -540,10 R14.1@-540,-200 ; -458.66,-351.34 ccw(c-445,-337.69) R18.1@-445,-357 ; R18.1@-453,-351 ccw(c-438.51,-351) -448.76,-361.24 ; R18.1@-445,-350 -445,-365 ; R18.1@-441,-351 ccw(c-397.54,-351) -428.27,-381.73 ; -410,-460 -410,-510 ; v1@-395.81,-530 ccw(c-409.84,-530) -399.92,-520.08 ccw(c-390,-510.16) v1@-390,-524.19 ; v1(-390,-530) -410,-510 ; R13.1@525,445 D3.2@605,525 ; R13.1@530,445 cw(c542.07,445) R13.1@533.54,453.54 ; 568.69,488.69 cw(c609.06,448.32) D3.2@609.06,505.41 ; 583.23,503.23 ccw(c563.43,523.03) D3.2@591.43,523.03 ; D3.2@589.17,509.17 cw(c609.06,489.29) D3.2@609.06,517.41 ; R14.1@-540,-200 -540,-270 -445,-365 ; -445,-365 -410,-400 -410,-510
  Top Layer w16: v1(115,-570) 250,-435 250,-375 290,-335 555,-335 v1(630,-410) ; 565.22,-345.22 ccw(c584,-326.44) R9.1@584,-353 ; R9.1@588,-355 ccw(c619.38,-355) 597.19,-377.19
  Top Layer w20: D3.2@605,525 D3.2@609.06,525 ; v1(925,-200) 925,-130 v1(945,-110) ; v1(945,-75) R47.2@945,-40
  Top Layer w30: P3.2@175,621.85 239.37,621.85 276.22,585 570,585 D3.2@630,525 ; 580.92,574.08 cw(c533.8,526.97) D3.2@600.43,526.97 ; D3.2@620.98,534.02 ccw(c650,563.04) v1@650,522 ; v1(630,-410) Q1.D@675,-410 v1(715,-410) ; v1(650,525) D3.2@630,525 ; v1@651.57,522.44 cw(c642.41,537.41) D3.2@630,525 ; v1(900,-225) v1(925,-200) ; v1(945,-110) v1(945,-75)
  Bottom Layer w12: v1(-390,-530) -345,-530 -305,-570 ; v1@-385.89,-534.11 cw(c-375.97,-544.03) -375.97,-530 cw(c-375.97,-515.97) v1@-385.89,-525.89 ; -295,-570 -305,-570 ; v1@110.89,-574.11 ccw(c100.97,-584.03) 100.97,-570 ccw(c100.97,-555.97) v1@110.89,-565.89 ; v1(115,-570) -305,-570
  Bottom Layer w20: v1(650,525) 725,525 750,500 750,410 905,255 905,125 945,85 v1(945,-75) ; v1(715,-410) 750,-375 750,-275 795,-230 v1@895,-230 ; 883.56,-230 ccw(c883.56,-208.56) v1@898.72,-223.72
  Bottom Layer w30: v1(630,-410) v1(715,-410) ; v1@895,-230 v1(925,-200) ; v1(945,-110) v1(945,-75)
VBAT: C21.1 C22.1 D1.2 D2.2 Q1.S R10.1 U4.3 | length 1332.6
  Top Layer w19.68: Q1.S@631.83,-324.23 ccw(c612.11,-304.51) 640,-304.51 ; Q1.S@640,-317.6 R10.1@640,-285
  Top Layer w20: D1.2@628.74,-565 633.74,-560 C22.1@705,-560 ccw(c705,-635.71) D1.2@650.86,-582.78 ; Q1.S@640,-317.6 640,-340 670,-370 775,-370 ; Q1.S@645.6,-330 ccw(c683.25,-330) 656.63,-356.63 ; D1.2@650.66,-547.02 ccw(c682.01,-515.67) 682.01,-560 ; 717.08,-370 ccw(c717.08,-260.73) U4.3@794.34,-338 ; U4.3@792.77,-347.07 cw(c774.48,-355.7) 788.78,-370 ; 800,-395 775,-370 ; U4.3@800,-358.78 788.78,-370 ; 775,-370 788.78,-370
  Top Layer w30: D2.2@503.74,-415 578.74,-490 628.74,-490 ; D2.2@507.68,-435.43 cw(c507.68,-475.26) D2.2@535.84,-447.1 ; D2.2@528.11,-415 ccw(c586.94,-415) 545.34,-456.6 ; D1.2@614.29,-550.55 ccw(c579.41,-515.67) 628.74,-515.67 ccw(c678.07,-515.67) D1.2@643.19,-550.55 ; D1.2@628.74,-565 628.74,-490 ; C21.1@746.54,-488.62 ccw(c736.55,-501.55) 725,-490 ; C21.1@747,-490 725,-490 ; C21.1@747.75,-488.03 cw(c797.91,-488.03) 762.44,-452.56 ; U4.3@800,-358.78 800,-395 800,-415 725,-490 ; 628.74,-490 725,-490
VBUS: C6.1 D2.1 P1.2 RW1.1 | length 4168
  Top Layer w20: P1.2@-850.15,187.76 ccw(c-910.86,248.47) v1@-825,248.47 ; P1.2@-846.15,128.81 cw(c-878.54,86.18) v1(-825,86.22) ; P1.2@-822.42,160.03 P1.2@-645.26,160.03 ; P1.2@-802.23,126.41 ccw(c-778.06,86.18) v1(-825,86.22) ; P1.2@-797.13,189.99 cw(c-746.48,250) v1(-825,250) v1(-825,86.22) ; P1.2@-794.69,132.3 cw(c-727.75,65.36) -727.75,160.03 cw(c-727.75,254.7) P1.2@-794.69,187.76 ; P1.2@-672.98,132.3 ccw(c-739.92,65.36) -739.92,160.03 ccw(c-739.92,254.7) P1.2@-672.98,187.76 ; v1(-190,711.22) RW1.1@-190,865 ; -190,765.18 cw(c-135.15,765.18) C6.1@-173.94,803.97 ; -190,854.82 ccw(c-135.15,854.82) C6.1@-173.94,816.03
  Top Layer w24: v1(151.26,-610) D2.1@346.26,-415 ; 299.54,-461.72 ccw(c252.81,-415) D2.1@318.89,-415 ; 309.04,-452.22 cw(c342.32,-485.5) D2.1@342.32,-438.43
  Bottom Layer w8: v1@-830.52,255.52 ccw(c-843.86,268.86) -825,268.86 ccw(c-806.14,268.86) v1@-819.48,255.52 ; v1(-825,250) -825,325 -775,375 -775,475 -750,500 -225,500 -190,535 v1(-190,711.22) ; v1@-195.52,705.7 cw(c-208.86,692.36) -190,692.36 cw(c-171.14,692.36) v1@-184.48,705.7
  Bottom Layer w20: -775,-340 -725,-390 -670,-390 -620,-440 -620,-535 -575,-580 -480,-580 -450,-610 ; -390,-610 -450,-610 ; v1(151.26,-610) -450,-610
  Bottom Layer w24: v1(-825,86.22) -825,-175 -775,-225 -775,-340
VDD: C28.2 C33.2 C35.2 C36.2 C44.2 L3.1 U6.1 U6.22 U6.31 | length 2184.8
  Top Layer w7.87: -300,-125 -290.12,-134.88 U6.1@-253.74,-134.88 ; U6.31@-214.37,-111.26 -214.37,-39.37 ; U6.22@-96.26,-166.38 -56.38,-166.38 ; -47.86,-157.86 cw(c-39.41,-166.3) v1@-35.07,-155.18 ; v1@-37.93,-162.51 ccw(c-44.2,-178.56) -56.38,-166.38 ; v1(-35,-155) -45,-155 -56.38,-166.38
  Top Layer w12: C33.2@-405,-15 -376.22,-15 v1(-375,-13.78) -325,-63.78 -325,-100 -300,-125 ; -391.98,-15 ccw(c-391.98,3.2) v1@-379.11,-9.67 ; v1@-375,-19.59 cw(c-375,-33.62) -365.08,-23.7 cw(c-355.16,-13.78) v1@-369.19,-13.78 ; -214.37,-39.37 v1(-175,0) C28.2@-175,55 ; v1@-180.81,0 cw(c-194.84,0) -184.92,-9.92 cw(c-175,-19.84) v1@-175,-5.81 ; v1@-179.11,4.11 ccw(c-189.03,14.03) -175,14.03 ccw(c-160.97,14.03) v1@-170.89,4.11 ; C44.2@-80,-410 -80,-363 L3.1@-72,-355 -53.5,-355 ; C44.2@-80,-399.82 cw(c-29.15,-399.82) L3.1@-65.11,-363.86 ; L3.1@-80,-370.85 cw(c-58.12,-370.85) L3.1@-73.59,-355.38 ; -78.31,-393.51 ccw(c-61.14,-398.11) C44.2@-76.54,-407 ; L3.1@-72.78,-355.14 ccw(c-64.73,-333.3) -48.26,-349.76 ; L3.1@-68.63,-343.88 ccw(c-57.58,-313.92) -35,-336.5 ; L3.1@-65.11,-361.89 cw(c-48.47,-378.53) -48.47,-355 cw(c-48.47,-331.47) L3.1@-65.11,-348.11 ; v1@-39.24,-309.24 cw(c-49.49,-319.49) -35,-319.49 cw(c-20.51,-319.49) v1@-30.76,-309.24 ; v1(-35,-305) -35,-336.5 ; v1(-35,-155) C35.2@80,-155 ; v1@-30.76,-159.24 cw(c-20.52,-169.49) -20.52,-155 cw(c-20.51,-140.51) v1@-30.76,-150.76 ; C36.2@0.75,-355 -20,-355 ; -53.5,-355 cw(c-53.5,-342.32) -63.96,-349.49 ccw(c-53.5,-342.32) -53.5,-355 ; -53.5,-355 ccw(c-53.5,-367.68) -63.96,-360.51 cw(c-53.5,-367.68) -53.5,-355 ; -53.5,-355 -35,-355 ; -53.5,-355 -35,-336.5 ; -35,-355 -20,-355 ; -35,-355 -35,-340 ; -35,-340 -35,-336.5 ; -35,-340 -20,-355
  Bottom Layer w12: v1@-375,-19.59 cw(c-375,-33.62) -365.08,-23.7 cw(c-355.16,-13.78) v1@-369.19,-13.78 ; v1(-375,-13.78) -350,-38.78 -350,-100 -230,-220 -175,-220 ; v1@-179.11,-4.11 cw(c-189.03,-14.03) -175,-14.03 cw(c-160.97,-14.03) v1@-170.89,-4.11 ; v1(-175,0) -175,-220 ; v1@-39.24,-300.76 ccw(c-49.49,-290.51) -35,-290.51 ccw(c-20.51,-290.51) v1@-30.76,-300.76 ; v1@-39.24,-159.24 cw(c-49.49,-169.49) -35,-169.49 cw(c-20.51,-169.49) v1@-30.76,-159.24 ; v1(-35,-305) -35,-240 ; -35,-187.5 -35,-200 ; v1(-35,-155) -35,-200 ; -175,-220 -55,-220 ; -55,-220 -35,-200 ; -55,-220 -35,-220 ; -55,-220 -35,-240 ; -35,-240 -35,-220 ; -35,-220 -35,-200
VDD3V3: Q2.D R15.2 RE1.1 RE5.1 | length 508
  Top Layer w7.87: 668,-67 668,-63.78
  Top Layer w12: 670,-55.3 ccw(c716.04,-55.3) Q2.D@683.49,-87.86 ; R15.2@670,-40 670,-105 Q2.D@675,-110 ; Q2.D@675,-115.65 cw(c675,-153.44) 701.72,-126.72 ; Q2.D@675,-100 710,-135 v1(725,-135) ; Q2.D@687,-103.65 ccw(c707.15,-103.65) Q2.D@692.9,-117.9 ; Q2.D@689.15,-114.15 ccw(c725,-78.3) v1@725,-129 ; 709.64,-134.64 ccw(c725,-119.27) v1@725,-141 ; v1@720.76,-139.24 ccw(c710.51,-149.49) 710.51,-135 ccw(c710.51,-120.51) v1@720.76,-130.76
  Bottom Layer w12: v1(725,-135) 770,-135 780,-145 RE1.1@840,-145 RE5.1@905,-145 ; v1@729.24,-139.24 cw(c739.49,-149.49) 739.49,-135 cw(c739.49,-120.51) v1@729.24,-130.76
pads on no net: 8.1@-299.04,-67.97 *.1@-692.74,-461.67 *.2@-488.01,-316 U6.9 U6.13 UB1. UB1.3 UB1.7 Y2.3

## Polygon pours and split planes (outlines as drawn)
GND on Top Layer "Top Layer-No Net" (hatched 45Degree grid 9 track 11, remove dead copper, pour order 4): -990,1010 -990,-1035 1060,-1035 1060,1010 -990,1010
GND on Bottom Layer "Top Layer-No Net" (hatched 45Degree grid 9 track 11, remove dead copper, pour order 3): -990,1010 -990,-1035 1060,-1035 1060,1010 -990,1010

## Keep-outs
Keep-Out Layer:
  circle w3.94: c0,708.66 r39.37
  circle w3.94: c0,-715.35 r39.37
  circle w3.94: c-696.92,-43.8 r19.68
  circle w3.94: c-891.42,-43.8 r19.68
  pour cut-out: -393.7,-637.8 ccw(c-393.7,-748.03) -503.94,-748.03 ccw(c-393.7,-748.03) -393.7,-858.27 ccw(c-393.7,-748.03) -283.46,-748.03 ccw(c-393.7,-748.03)
  pour cut-out: 393.7,-637.8 ccw(c393.7,-748.03) 283.46,-748.03 ccw(c393.7,-748.03) 393.7,-858.27 ccw(c393.7,-748.03) 503.94,-748.03 ccw(c393.7,-748.03)
  pour cut-out: 393.7,858.27 ccw(c393.7,748.03) 283.46,748.03 ccw(c393.7,748.03) 393.7,637.8 ccw(c393.7,748.03) 503.94,748.03 ccw(c393.7,748.03)
  pour cut-out: -393.7,858.27 ccw(c-393.7,748.03) -503.94,748.03 ccw(c-393.7,748.03) -393.7,637.8 ccw(c-393.7,748.03) -283.46,748.03 ccw(c-393.7,748.03)
  lines w5.91: -892.13,415.98 -892.13,183.07 -933.07,183.07 ccw(c-933.07,163.39) -952.76,163.39 -952.76,-190.94 ccw(c-933.07,-190.94) -933.07,-210.63 -892.13,-210.63 -892.09,-415.98 ; -892.03,-415.98 ccw(c0,0) -403.95,-897.54 -248.03,-897.54 -248.03,-960.63 248.03,-960.63 248.03,-897.64 403.95,-897.64 ; -892.03,415.98 cw(c0,0) -420.96,889.69 ; -421,889.76 -248.03,889.76 -248.03,944.88 248.03,944.88 248.03,889.76 421,889.76 ; 403.95,-897.54 ccw(c0,0) 420.96,889.69

## Other copper
Top Layer:
  region net VBUS: -595,110 -595,210 -871.67,210 -871.67,110
  region net GND: -571.6,-281.17 -571.6,-170.93 -688.63,-170.93 -688.63,-281.17
  region net GND: -651.83,-340 -651.83,-160 -875,-160 -875,-340
  region net GND: -145.4,-574.55 -145.4,-534.81 -224.5,-534.81 -224.5,-574.55
  region net GND: -160,-610.46 -160,-545 -296.56,-545 -296.56,-610.46
  region net GND: 167.37,-400.07 149.06,-381.77 116.85,-413.98 135.15,-432.29
  region net GND: 181.61,-302.94 159.33,-280.67 118.81,-321.19 141.08,-343.47
  region net GND: 164.25,-398.09 164.25,-315 110,-315 110,-398.09
  region net GND: 872.9,-270 872.9,-86.5 805,-86.5 805,-270
  region net GND: 820,-510 802.32,-492.32 779.82,-514.82 797.5,-532.5
  region net GND: 846.82,-468.18 816.82,-438.18 785,-470 815,-500
  region net GND: 820,-510 820,-470 785,-470 785,-510
  region net GND: 770,-585 770,-531.5 731.19,-531.5 731.19,-585
  region net NetL3_2: -112.5,-337.5 -124.17,-325.83 -134.09,-335.76 -122.42,-347.42
  region net NetL3_2: -114.5,-341.5 -130.5,-325.5 -142.5,-337.5 -126.5,-353.5
  region net GND: -205,-770 -205,-695 -266.33,-695 -266.33,-770
  region net GND: 970,-16.13 970,38.32 925,38.32 925,-16.13
  region net GND: -137.24,-235.86 -154.91,-218.18 -169.06,-232.32 -151.38,-250
  region net GND: -425,-520 -425,-440 -465,-440 -465,-520
  region net NetD3_1: 395,495 395,525 355,525 355,495
  region net NetD3_1: 417.5,517.5 402.5,532.5 380,510 395,495
  region net NetD3_1: 369.14,509.14 349.14,529.14 335,515 355,495
  region net GND: 25,-405 25,-381.35 -32.73,-381.35 -32.73,-405
  region net GND: 25,-405 5,-385 -31.56,-421.56 -11.56,-441.56
  region net GND: 0.75,-420.5 0.75,-395 -25.75,-395 -25.75,-420.5
  region net NetL2_2: -240,5 -240,40 -245,45 -275,45 -280,40 -280,5 -260,-15
  region net GND: -245,180 -240,185 -240,330 -255,345 -270,345 -280,335 -280,185 -275,180
  region net GND: -525,-105 -520,-100 -460,-100 -435,-125 -435,-315 -440,-320 -465,-320 -521.13,-263.87 -521.13,-230 -516.13,-225 -465,-225 -460,-220 -460,-185 -470,-175 -520,-175 -525,-170
  region net GND: -145,340 -210,340 -225,325 -225,195 -205,175 -160,175 -95,240 -95,360 -125,360
  region net NetL2_2: -230,-98 -230,-120 -231,-120 -260,-91 -260,-80 -257,-70 -257,-71
  region net GND: -225,930 -125,930 -120,925 -120,900 -125,895 -225,895 -230,900 -230,925
  region net NetC30_1: -275,170 -280,165 -280,60 -275,55 -245,55 -240,60 -240,165 -245,170
  pour cut-out: -235,-125 -250,-125 -300,-75 -300,300 -325,325 -775,325 -800,350 -800,600 -500,900 -350,900 -275,825 -275,775 -115,615 -115,360 -150,325 -200,325 -215,310 -215,-105
Bottom Layer:
  pour cut-out: -775,350 -800,375 -800,600 -500,900 -350,900 -275,825 -275,775 -125,625 -125,365 -135,355 -205,355 -225,335 -225,20 -245,0 -275,0 -295,20 -295,325 -320,350

## Silkscreen, mask and mechanical layers (free items; w line width, h text height)
Top Overlay:
  circle w3.94: c393.7,748.03 r118.11
  circle w3.94: c-393.7,748.03 r106.3
  circle w3.94: c393.58,-750 r106.3
  circle w3.94: c-393.7,-748.03 r106.3
  circle w5: c725.12,196.03 r196.85
  lines w5: -892.13,332.68 -53.43,332.68 ; -239.09,886.43 -239.09,778.6 -53.42,778.6 -53.42,332.68
  text "RD" at 575,700 h30
  text "TD" at 695,575 h30
  text "TL-99" at -775,500 h40
  text "JYD-QS-BUTTH" at -775,415 h40
  text "GND" at -125,400 h30 r45
  text "+" at 825,375 h40
  text "V1.0" at -775,350 h30
  text "20-6-18" at -625,350 h30
  text "RST" at -60,350 h30 r45
  text "P06" at 0,300 h30 r45
  text "P07" at 50,250 h30 r45
  text "P04" at 100,200 h30 r45
  text "P05" at 150,150 h30 r45
  text "M3V3" at 175,50 h30 r45
  text "BTV" at 125,-750 h30 r90
  text "GND" at -150,-760 h30
  text "KEY" at -175,-925 h30 r90